# EAGLE board Analog_3 (EAGLE 8.2.1)
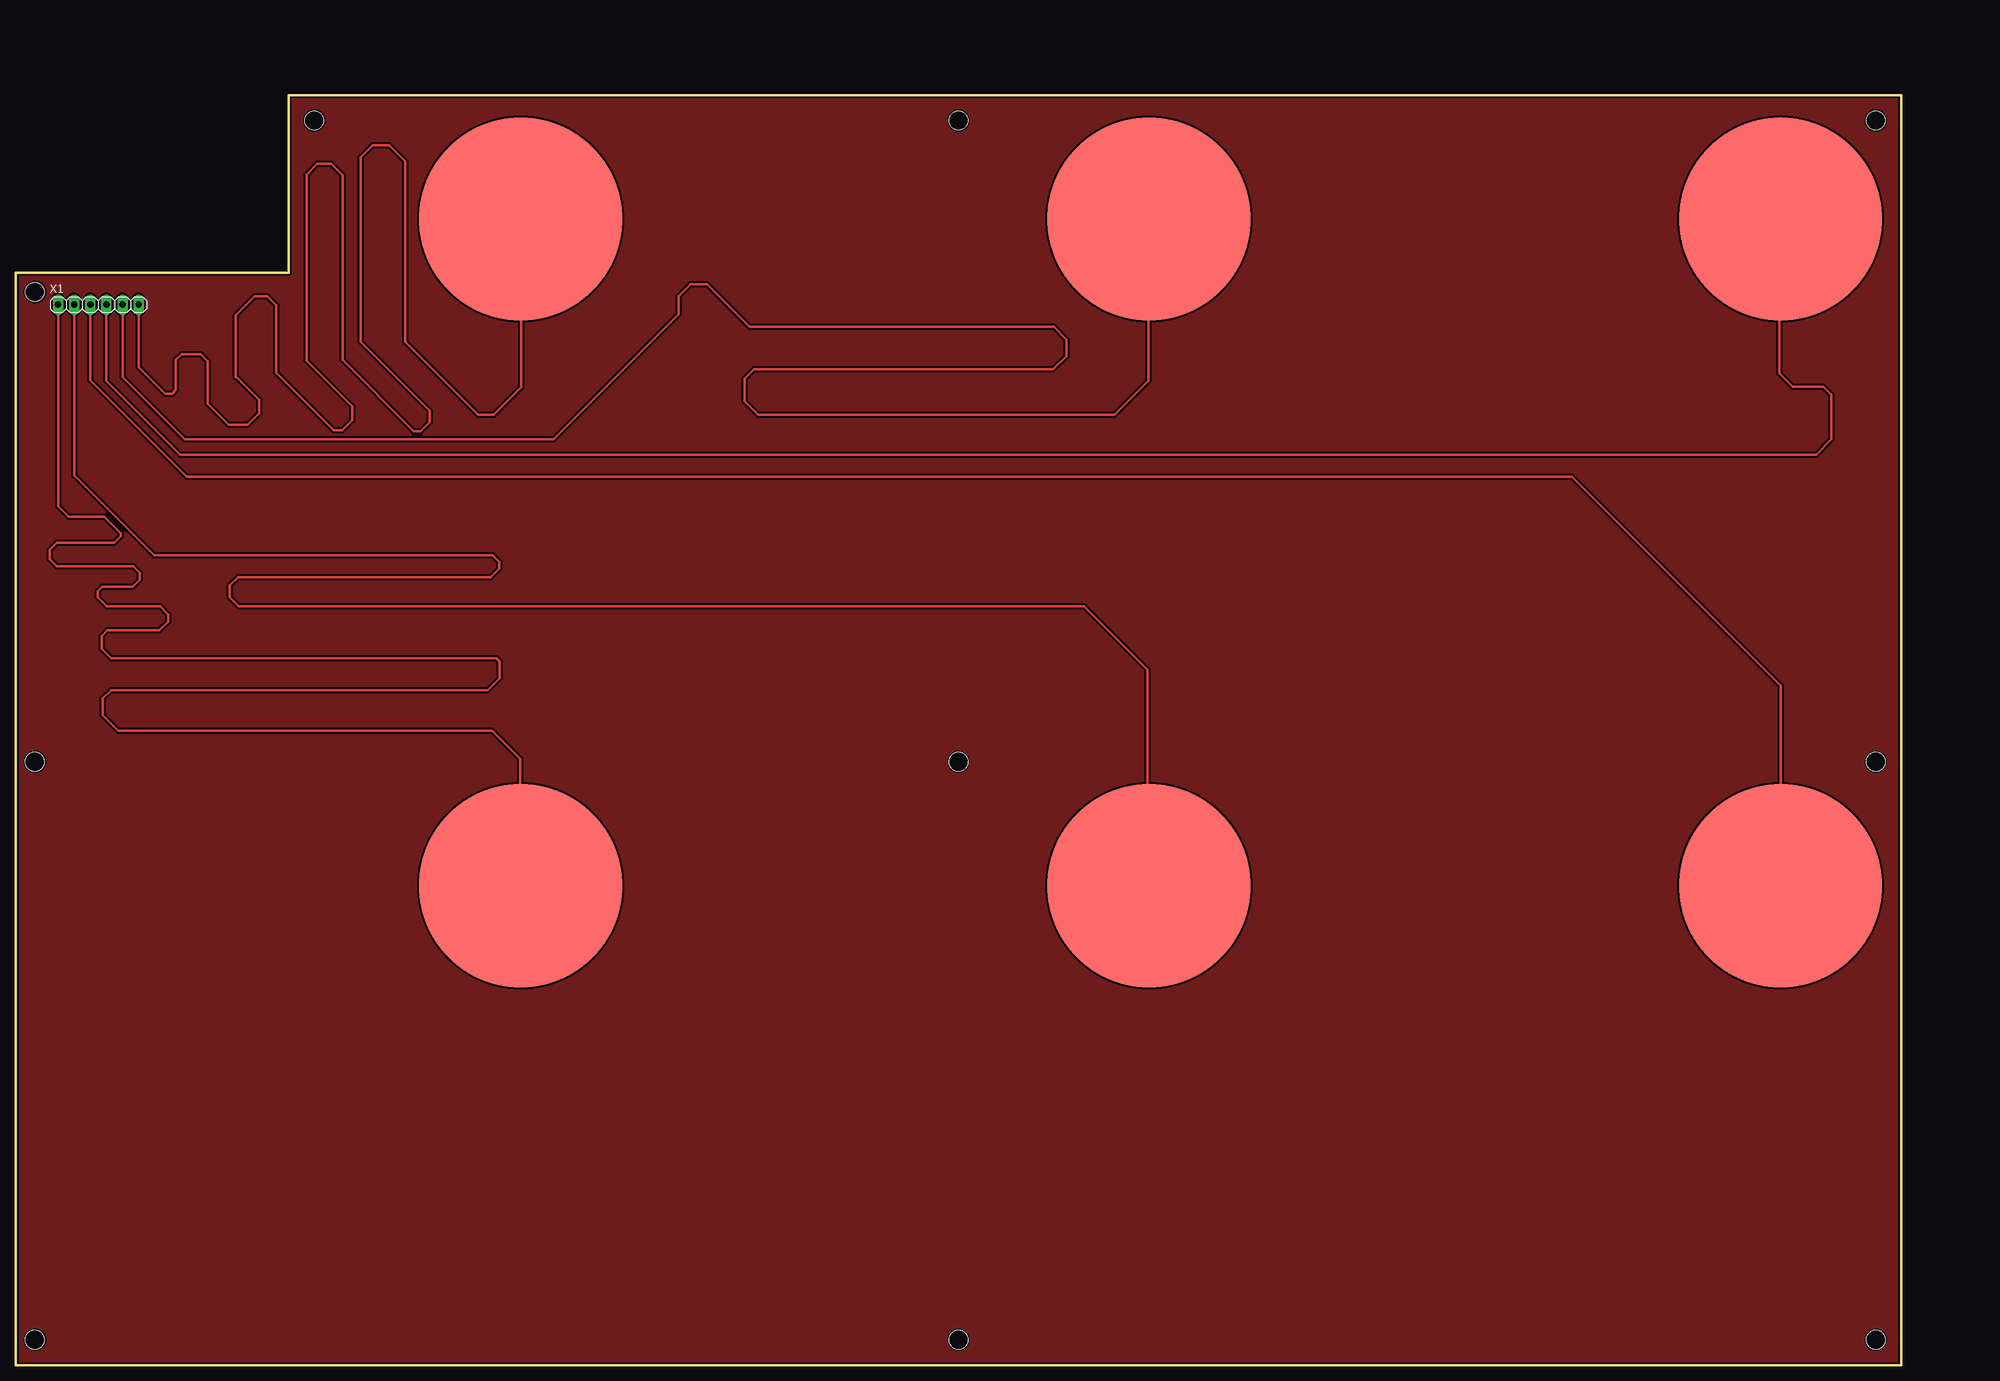
[diagram p0: board, top side]

Size 297 x 200 mm. Coordinates in mm from the lower left corner, seen from the top.
Outline: 297,0 297,200 43,200 43,172 0,172 0,0 297,0
Copper layers 16: Bottom 0.105mm
Design rules "eC_1Layer_PClass3_BaseCopperO105 *": minimum track width 0.25mm, minimum drill 0.35mm, track to track 0.3mm, track to pad 0.3mm, pad to pad 0.3mm, via to via 0.3mm, smd to smd 0mil, copper to edge 0.25mm, drill to drill 0.35mm, minimum pad ring 0.3mm, minimum via ring 0.3mm, stop-mask expansion 0mil, vias tented up to drill 0.45mm, thermal gap 0.2mm
Holes 3 mm at 293,196 293,4 3,4 3,169 47,196 293,95 3,95 148.5,4 148.5,196 148.5,95

## Footprints (pad centres in the part's own frame; a part is rotated, then mirrored left to right if it is on the bottom)
PAD = smd 32 x 32: P$1 0,0
1X06 = drill 1.016 long: 1 -6.35,0; 2 -3.81,0; 3 -1.27,0; 4 1.27,0; 5 3.81,0; 6 6.35,0

## Placement (x,y rotation side)
1  [PAD]  278,75.5 180 top
E$1  [PAD]  278,180.5 180 top
E$3  [PAD]  178.5,75.5 180 top
E$4  [PAD]  178.5,180.5 180 top
E$5  [PAD]  79.5,75.5 180 top
E$6  [PAD]  79.5,180.5 180 top
X1  [1X06]  13,167 0 top

## Library data of the parts
1 E$1 E$3-E$6 = pad
X1 = pinhead

## Nets
S$1: 1.P$1

## Tracks (layer width: path | path; a pad name or v marks a point on that pad's centre or on a via)
S$1
  Top 0.406: 1.P$1 278,107 245.1,139.9 26.9,139.9 11.72,155.08 11.72,167.04
S$2
  Top 0.406: 178.3,75.6 178.3,109.5 168.3,119.5 35.1,119.5 33.7,120.9 33.7,122.8 35,124.1 74.8,124.1 76.1,125.4 76.1,126.5 75.1,127.5 21.8,127.5 9.2,140.1 9.2,167
S$3
  Top 0.406: 79.4,75.6 79.4,95.5 75,99.9 16.1,99.9 13.7,102.3 13.7,105 15,106.3 74.3,106.3 76.2,108.2 76.2,110.8 75.7,111.3 15,111.3 13.5,112.8 13.5,114.8 14.4,115.7 22.6,115.7 24,117.1 24,118.2 22.7,119.5 14.3,119.5 12.9,120.9 12.9,121.9 13.6,122.6 18.4,122.6 19.5,123.7 19.5,124.8 18.5,125.8 6.4,125.8 5.3,126.9 5.3,128.4 6.4,129.5 15.5,129.5 16.5,130.5 16.5,131 13.9,133.6 8.3,133.6 6.67,135.23 6.67,167.01
S$4
  Top 0.406: 178.4,180.5 178.4,155 173.1,149.7 116.9,149.7 114.8,151.8 114.8,155.3 116.3,156.8 163.4,156.8 165.5,158.9 165.5,161.5 163.5,163.5 115.6,163.5 108.9,170.2 106.3,170.2 104.4,168.3 104.4,165.5 84.7,145.8 26.6,145.8 16.8,155.6 16.8,167
S$5
  Top 0.406: 277.8,179.5 277.8,156.2 279.9,154.1 284.7,154.1 286,152.8 286,145.8 283.6,143.4 25.9,143.4 14.25,155.05 14.25,166.99
S$6
  Top 0.406: 79.6,180.6 79.6,154 75.3,149.7 72.8,149.7 61.3,161.2 61.3,189.6 58.8,192.1 56.2,192.1 54.3,190.2 54.3,161.2 65.2,150.3 65.2,148.5 63.8,147.1 62.7,147.1 51.5,158.3 51.5,187.4 49.7,189.2 47.5,189.2 45.8,187.5 45.8,158.2 53,151 53,148.8 51.4,147.2 50.1,147.2 41,156.3 41,166.9 39.6,168.3 37.6,168.3 34.6,165.3 34.6,155.7 | 34.6,155.7 34.6,155.6 | 34.6,155.7 38.3,152 38.3,149.9 36.5,148.1 33.5,148.1 30.2,151.4 30.2,158.1 29.1,159.2 26.1,159.2 25.2,158.3 25.2,153.6 24.6,153 23.5,153 19.35,157.15 19.35,167.03
S$7
  pour Top: 297,200 43,200 43,172 0,172 0,0 297,0